# Altium PCB partialvna.PcbDoc
Units mm, origin at the board's own origin, x right, y up, seen from the top; angles counter-clockwise.
Board outline 49.91 x 49.91 mm, 2 copper layers (Top Layer, Bottom Layer); 32 components, 21 nets, 86 pads, 0 vias.
Unrouted connection lines stored in the file: 50.
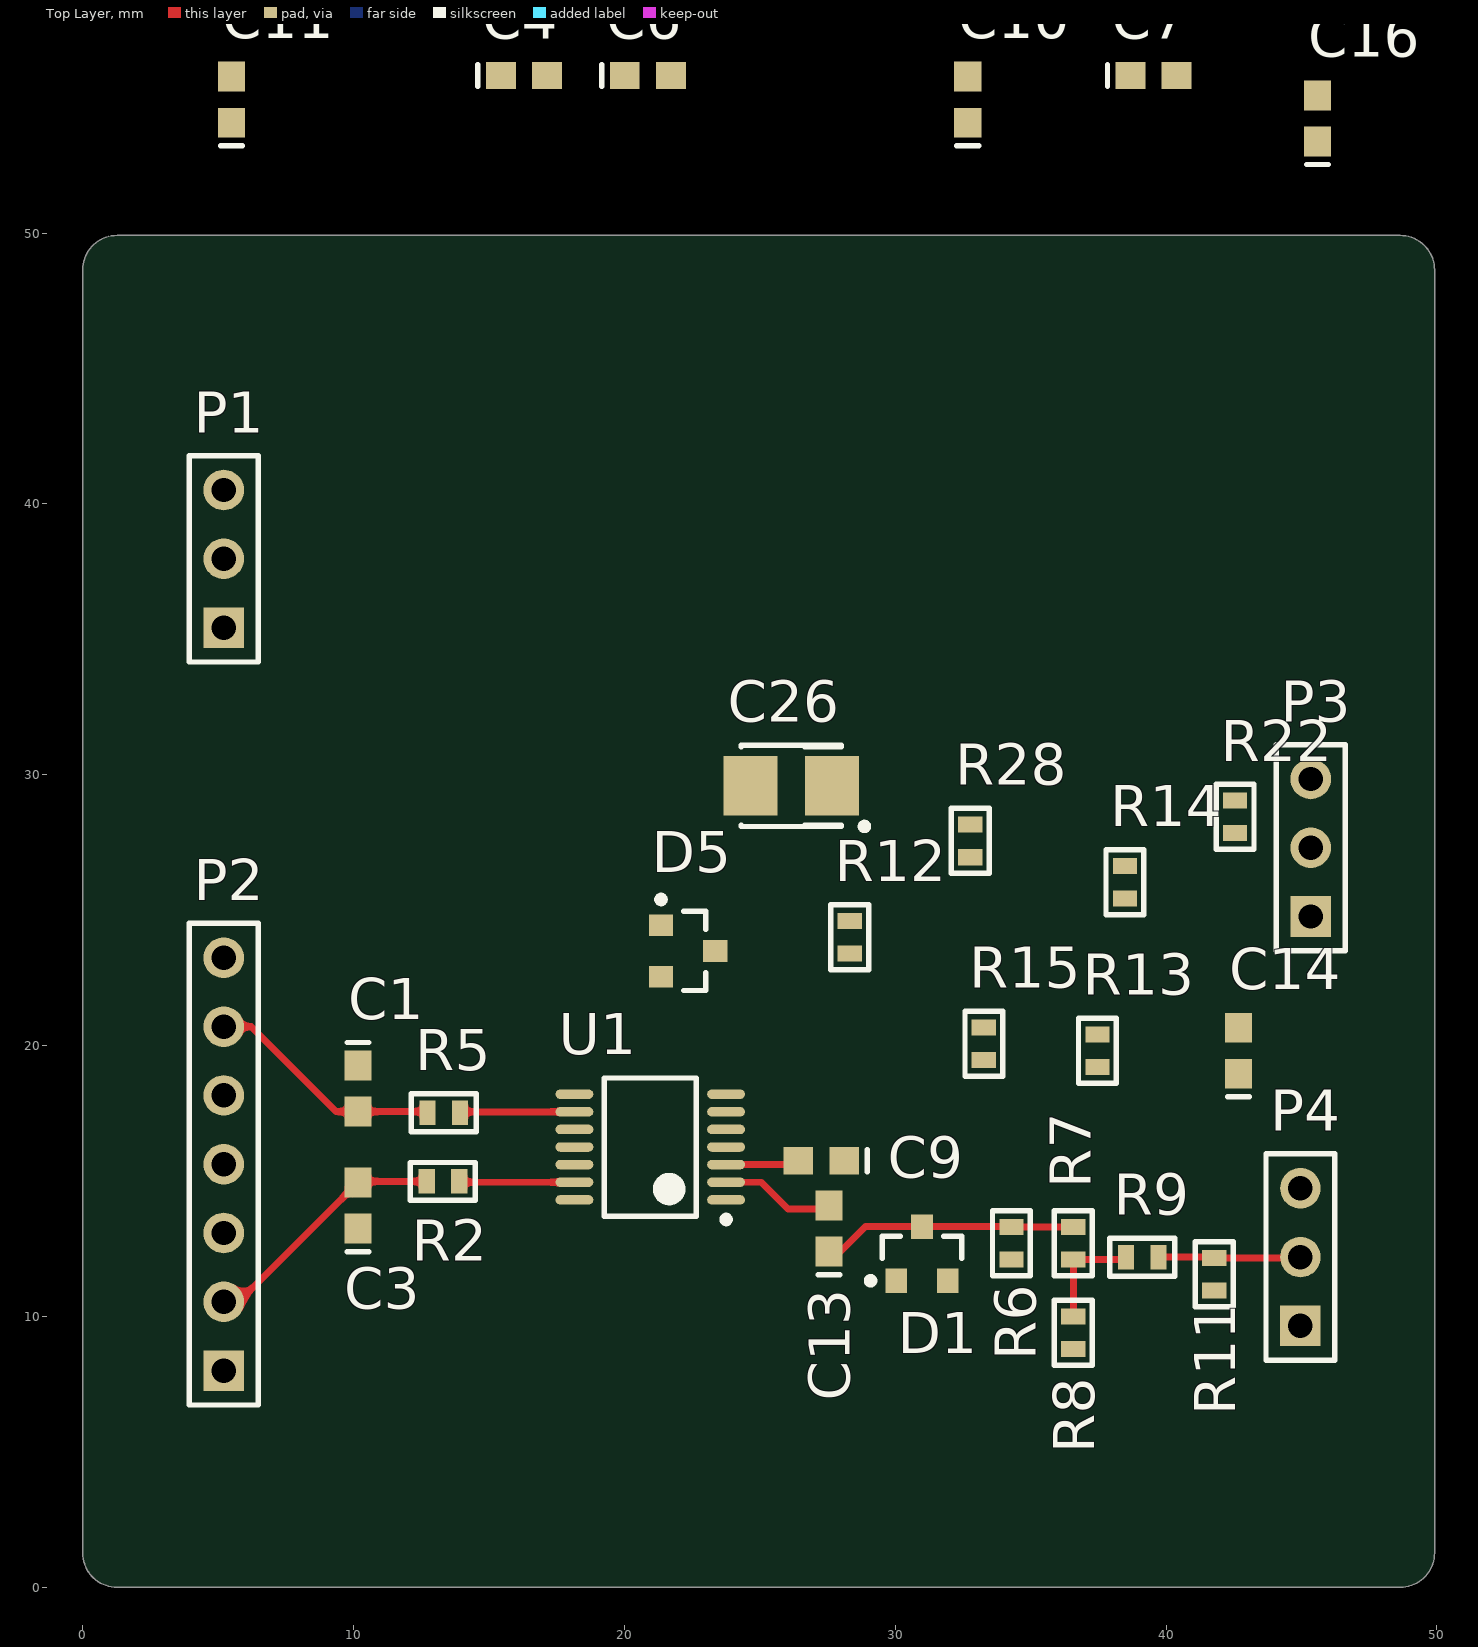
[diagram p0: Top Layer view]
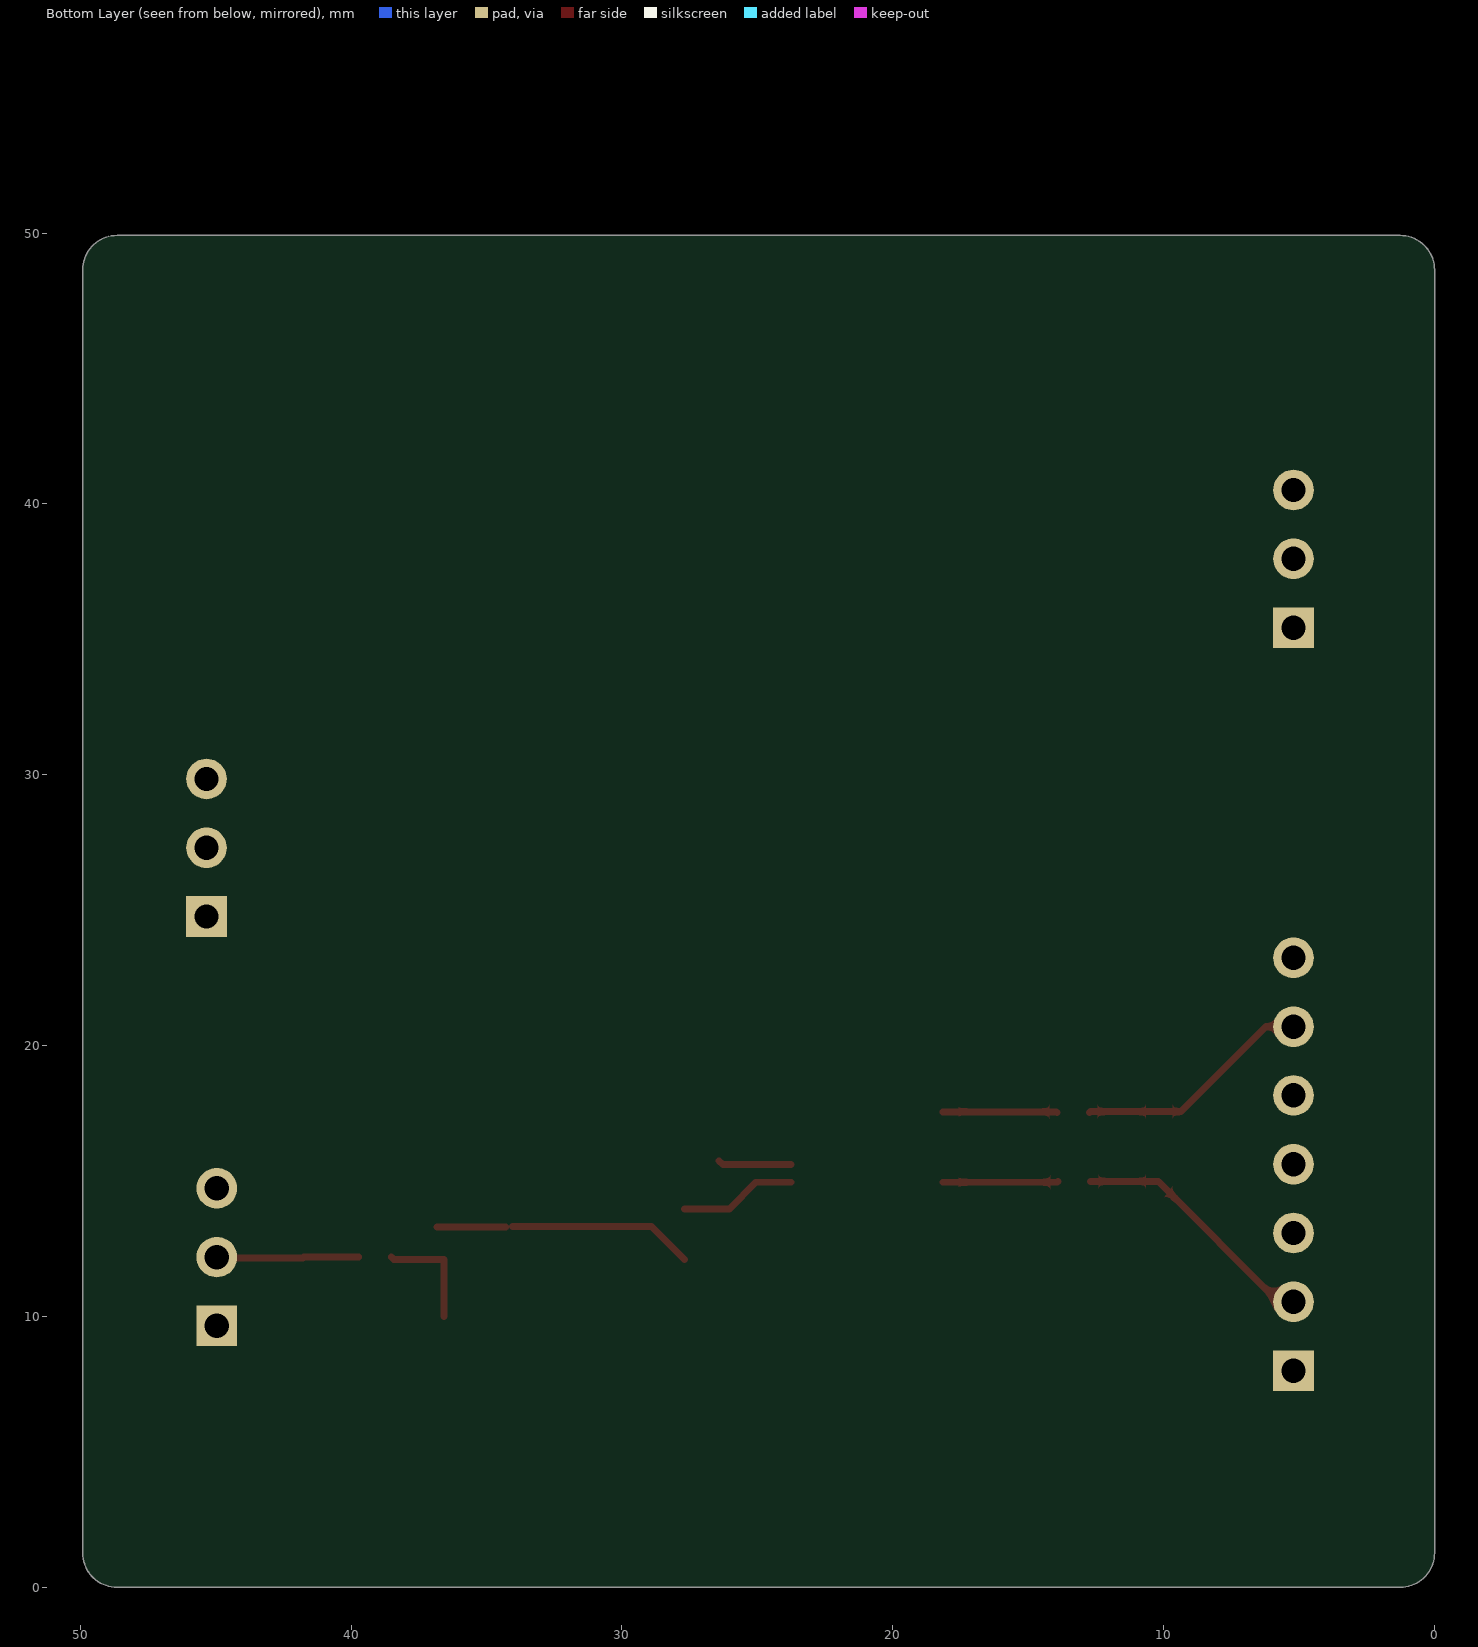
[diagram p1: Bottom Layer view, seen from below]

## Layer stack, top to bottom
Top Solder: solder mask 0.0102, Solder Resist, Dk 3.5
Top Layer: signal copper 0.0356
Dielectric 1: dielectric 0.32, FR-4, Dk 4.8
Bottom Layer: signal copper 0.0356
Bottom Solder: solder mask 0.0102, Solder Resist, Dk 3.5

## Board outline
0,1.27 0,48.641 cw(c1.27,48.641) 1.27,49.911 48.641,49.911 cw(c48.641,48.641) 49.911,48.641 49.911,1.27 cw(c48.641,1.27) 48.641,0 1.27,0 cw(c1.27,1.27)

## Design rules (kind name [scope] priority, off if disabled: settings)
Clearance [All] p1: gap=0.254 ignorepadtopadclearanceinfootprint=FALSE except(0: Arc-Hole Track-Hole SMDPad-Hole THPad-Hole Via-Hole Fill-Hole Poly-Hole Region-Hole Text-Hole)
PolygonConnect [All] p1: connectstyle=Relief reliefconductorwidth=0.254 reliefentries=4 polygonreliefangle="90 Angle" airgapwidth=0.254
RoutingVias [All] p1: holewidth=0.711 width=1.27 viastyle="Through Hole" minholewidth=0.711 minwidth=1.27 maxholewidth=0.711 maxwidth=1.27
SolderMaskExpansion [All] p1: expansion=0.102
Width [All] p1: maxlimit=0.254 minlimit=0.254 preferedwidth=0.254
30 further rules are at their usual default settings.

## Components (designator, comment, footprint, x,y, rotation, side; value= is the part's Value field where it differs from the comment)
C1 "C0603" 0603 10.16,18.415 r270 top value=100nF
C3 "C0603" 0603 10.16,14.097 r90 top value=100nF
C4 "C0603" 0603 16.294,55.814 r0 top value=10nF
C6 "C0603" 0603 20.866,55.814 r0 top value=10nF
C7 "C0603" 0603 39.535,55.814 r0 top value=100nF
C9 "C0603" 0603 27.266,15.748 r180 top value=10nF
C10 "C0603" 0603 32.677,54.925 r90 top value=10nF
C11 "C0603" 0603 5.499,54.925 r90 top value=10nF
C13 "C0603" 0603 27.559,13.247 r90 top value=10nF
C14 "C0603" 0603 42.672,19.812 r90 top value=10nF
C16 "C0603" 0603 45.593,54.229 r90 top value=100nF
C26 "T491T" T 26.162,29.591 r180 top value=15uF
D1 "BAV99LT1" ONSC-SOT-23-3-318-08_V 30.988,12.319 r90 top
D5 "BAV99LT1" ONSC-SOT-23-3-318-08_V 22.352,23.495 r0 top
P1 "VCC_in" HDR1X3 5.207,35.433 r90 top
P2 "SigOut" HDR1X7 5.207,8.001 r90 top
P3 "REFL_DET" HDR1X3 45.339,24.765 r90 top
P4 "RX_DET" HDR1X3 44.958,9.652 r90 top
R2 "1k 0603 1%" R0603 13.3,14.986 r0 top value=1k
R5 "1k 0603 1%" R0603 13.335,17.526 r0 top value=1k
R6 "51R 0603 1%" R0603 34.29,12.7 r90 top value=51R
R7 "27R 0603 1%" R0603 36.576,12.7 r270 top value=27R
R8 "33R 0603 1%" R0603 36.576,9.398 r90 top value=33R
R9 "27R 0603 1%" R0603 39.116,12.192 r0 top value=27R
R11 "100K 0603 1%" R0603 41.783,11.557 r90 top value=100K
R12 "51R 0603 1%" R0603 28.321,24.003 r90 top value=51R
R13 "27R 0603 1%" R0603 37.465,19.812 r90 top value=27R
R14 "33R 0603 1%" R0603 38.481,26.035 r90 top value=33R
R15 "27R 0603 1%" R0603 33.274,20.066 r90 top value=27R
R22 "100K 0603 1%" R0603 42.545,28.448 r90 top value=100K
R28 "10R 0603 1%" R0603 32.766,27.559 r90 top value=10R
U1 "AD8302ARUZ" ADI-RU-14_L 20.955,16.256 r180 top

## Footprints (in the part's own frame and the unit in brackets; to place one, negate y for a bottom-side part, rotate by r counter-clockwise, add the part's x,y. Pads: shape width x height; smd on the part's side, far side on the other; paste and mask are expansions set on the pad)
0603 [mm] "Chip Capacitor; Body 1.6 x 0.8 mm (LxW typ)"
  rect 1.1x1 smd: 1(-0.85,0) 2(0.85,0)
  silkscreen extent -1.7,-0.4 -1.7,0.4
ADI-RU-14_L [mm] "TSOP, 14-Leads, Body 5x4.4mm, Pitch 0.65mm, IPC High Density"
  oval 1.4x0.35 smd: 1(-2.8,1.95) 2(-2.8,1.3) 3(-2.8,0.65) 4(-2.8,0) 5(-2.8,-0.65) 6(-2.8,-1.3) 7(-2.8,-1.95) 8(2.8,-1.95) 9(2.8,-1.3) 10(2.8,-0.65) 11(2.8,0) 12(2.8,0.65) 13(2.8,1.3) 14(2.8,1.95)
  silkscreen extent -2.93,-2.55 1.7,2.8, body extent -2.25,-2.55 2.25,2.55, height 1.2
HDR1X3 [mm] "Connector; Header; 3 Position"
  rect 1.5x1.5 hole 0.9: 1(0,0)
  round 1.5 hole 0.9: 2(2.54,0) 3(5.08,0)
  silkscreen extent -1.27,-1.27 6.35,1.27
HDR1X7 [mm] "Connector; Header; 7 Position"
  rect 1.5x1.5 hole 0.9: 1(0,0)
  round 1.5 hole 0.9: 2(2.54,0) 3(5.08,0) 4(7.62,0) 5(10.16,0) 6(12.7,0) 7(15.24,0)
  silkscreen extent -1.27,-1.27 16.51,1.27
ONSC-SOT-23-3-318-08_V [mm] "SOT23, 3-Leads, Body 2.92x1.3mm, Pitch 0.95mm"
  rect 0.9x0.8 smd: 1(-1,0.95) 2(-1,-0.95) 3(1,0)
  silkscreen extent -1.12,-1.46 0.65,2.02, body extent -0.65,-1.46 0.65,1.46, height 1.11
R0603 [mm]
  rect 0.6x0.9 smd: 1(-0.6,0) 2(0.6,0)
  silkscreen extent -1.2,-0.7 1.2,0.7
T [mm] "Capacitor, SM Tantalum; Body 3.5 x 2.8 mm (LxW typ)"
  rect 2x2.2 smd: 1(-1.5,0) 2(1.5,0)
  silkscreen extent -2.83,-1.5 1.85,1.62

## Part data
C1 C3 C4 C6 C7 C9 C10 C11 C13 C14 C16: "Ceramic Chip Capacitor - Standard", PackageDocument=Mar-2001, Code_IPC="1608 [0603]", Code_JEITA=0603, ComponentLink1Description="Manufacturer Link", ComponentLink1URL=http://www.kemet.com/, ComponentLink2Description=Datasheet, ComponentLink2URL=http://www.kemet.com/kemet/web/homepage/kechome.nsf/vapubfilesname/F3102TA.pdf/$file/F3102TA.pdf, DatasheetDocument=Mar-2001, LatestRevisionDate=19-Mar-2004, LatestRevisionNote="Silkscreen size reduced.", Note="Footprint corresponds to dimensions for bulk cassette packaging. This case size has tightened tolerances.", PackageReference=0603, Published=17-Jul-2002, Publisher="Altium Limited"
C26: "Solid Tantalum Chip Capacitor, Low Profile T491 Series - Industrial Grade", PackageDocument=Mar-2001, Code_JEITA=3528-12, ComponentLink1Description="Manufacturer Link", ComponentLink1URL=http://www.kemet.com/, ComponentLink2Description=Datasheet, ComponentLink2URL=http://www.kemet.com/kemet/web/homepage/kechome.nsf/vapubfilesname/F3102TA.pdf/$file/F3102TA.pdf, DatasheetDocument=Mar-2001, LatestRevisionDate=19-Mar-2004, LatestRevisionNote="Silkscreen dimensions re-sized.", PackageReference=T, Published=17-Jul-2002, Publisher="Altium Limited"
D1 D5: "Dual Series Switching Diodes, 3-Pin SOT-23, Tape and Reel", Manufacturer="On Semiconductor", Supplier Part Number 1=BAV99LT1OSCT-ND, ComponentLink1Description="Manufacturer URL", ComponentLink1URL=http://www.onsemi.com/, ComponentLink2Description=Datasheet, ComponentLink2URL=http://www.onsemi.cn/pub_link/Collateral/BAV99LT1-D.PDF, ComponentLink3Description="Package Specification", ComponentLink3URL=http://www.onsemi.cn/pub_link/Collateral/318-08.PDF, Configuration="Dual Series", DatasheetVersion="Rev. 9", IF Max (A)=0.215, Mounting Technology="Surface Mount", PackageDescription="3-Pin Small Outline Transistor, Body 2.92 x 1.3 mm, Pitch 0.95 mm", PackageReference=SOT-23-3-318-08, PackageVersion="Rev. AP, 11/2009", Packing="Tape and Reel", PartNumber=BAV99LT1, RoHS=FALSE, Supplier 1=Digi-Key, trr Max (ns)=6
P1 P3 P4: library part "Header 3", "Header, 3-Pin", LatestRevisionDate=17-Jul-2002, LatestRevisionNote="Re-released for DXP Platform.", Publisher="Altium Limited"
P2: library part "Header 7", "Header, 7-Pin", LatestRevisionDate=17-Jul-2002, LatestRevisionNote="Re-released for DXP Platform.", Publisher="Altium Limited"
R2 R5: library part "RES 1k 0603", Case=0603, Tolerance=1%, Publisher=iv
R6 R12: library part "RES 51R 0603", Case=0603, Tolerance=1%, Publisher=iv
R7 R9 R13 R15: library part "RES 27R 0603", Case=0603, Tolerance=1%, Publisher=iv
R8 R14: library part "RES 33R 0603", Case=0603, Tolerance=1%, Publisher=iv
R11 R22: library part "RES 100K 0603", Case=0603, Tolerance=1%, Publisher=iv
R28: library part "RES 10R 0603", Case=0603, Tolerance=1%, Publisher=iv
U1: library part CMP-0284-00076-1, "LF-2.7 GHz RF/IF Gain and Phase Detector, 60ns Response Time, RU-14, Pb-Free, 96 Tube", RF Frequency (MHz)=2700, Supply Current=19mA, Temp Stability (dB)=1dB, Voltage Supply (V)="2.7 to 5.5", Code_JEDEC=MO-153AB-1, ComponentLink1Description="Manufacturer URL", ComponentLink1URL=www.analog.com, ComponentLink2Description=Datasheet, ComponentLink2URL=http://www.analog.com/static/imported-files/data_sheets/AD8302.pdf, ComponentLink3Description="Package Specification", ComponentLink3URL=http://www.analog.com/static/imported-files/packages/36057385283879153717235186773RU14.pdf, DatasheetVersion="Rev. A", Dynamic Range (dB)=60dB, PackageDescription="14-Lead Thin Shrink Small Outline Package [TSSOP]", PackageReference=RU-14, PackageVersion=Aug-2002, Product Description="Dual-Channel Gain and Phase Outputs", Response Time (ns typ)=60ns

## Nets (pads, with @x,y where several pads share a name; then routed paths per layer and width w, separated by ;. In a path a pad name is that pad's centre, name@x,y a point inside that pad or via, vN(x,y) a via of type N, cw(c..) or ccw(c..) an arc to the next point about the centre after c; other vN are vias at no path point)
GND: C1.1 C3.1 C4.2 C6.2 C7.2 C9.1 C10.2 C11.1 C16.2 C26.2 D1.1 D1.2 D5.1 D5.2 P1.1 P1.3 P2.1 P2.3 P2.5 P2.7 P3.1 P3.3 P4.1 P4.3 R6.1 R8.1 R11.1 R12.2 R14.2 R22.2 U1.1 U1.7
INPA: C13.2 U1.2 | length 4.3
  Top Layer w0.254: U1.2 25.049,14.956 26.035,13.97 C13.2@27.686,13.97
INPA_Input: P4.2 R9.2 R11.2 | length 5.3
  Top Layer w0.254: R9.2 41.748,12.192 R11.2 44.866,12.157 P4.2@44.958,12.065
INPB: C14.2 U1.6
INPB_Input: P3.2 R15.2 R22.1
NetC4_1: C4.1 U1.8
NetC6_1: C6.1 U1.14
NetC7_1: C7.1 P2.4 U1.11
NetC9_2: C9.2 U1.3 | length 2.7
  Top Layer w0.254: U1.3 26.274,15.606 C9.2
NetC10_1: C10.1 R28.1 U1.4
NetC11_2: C11.2 U1.5
NetC13_1: C13.1 D1.3 R6.2 R7.1 | length 9.4
  Top Layer w0.254: C13.1@27.686,12.1 28.905,13.319 D1.3 R6.2@34.036,13.319 ; R6.2 R7.1 R7.1@36.83,13.3
NetC14_1: C14.1 D5.3 R12.1 R13.1
NetC16_1: C16.1 C26.1 R28.2
NetR2_2: R2.2 U1.12 U1.13 | length 4.3
  Top Layer w0.254: R2.2 13.93,14.956 U1.13
NetR5_2: R5.2 U1.9 U1.10 | length 4.2
  Top Layer w0.254: R5.2 13.965,17.556 U1.9
NetR7_2: R7.2 R8.2 R9.1 | length 4.1
  Top Layer w0.254: R8.2 R7.2 38.424,12.1 R9.1
NetR13_2: R13.2 R14.1 R15.1
VCC: P1.2
VMAG: C3.2 P2.2 R2.1 | length 9.3
  Top Layer w0.254: P2.2 5.754,10.541 C3.2 10.199,14.986 R2.1
VPHS: C1.2 P2.6 R5.1 | length 8.8
  Top Layer w0.254: P2.6 6.223,20.701 9.359,17.565 C1.2 12.696,17.565 R5.1

## Silkscreen, mask and mechanical layers (free items; w line width, h text height)
Mechanical 1:
  lines w0.5: 0,1.27 ccw(c1.27,1.27) 1.27,0 48.641,0 ccw(c48.641,1.27) 49.911,1.27 49.911,48.641 ccw(c48.641,48.641) 48.641,49.911 1.27,49.911 ccw(c1.27,48.641) 0,48.641 0,6.35 0,1.27